# EAGLE board jimduino (EAGLE 7.4.0)
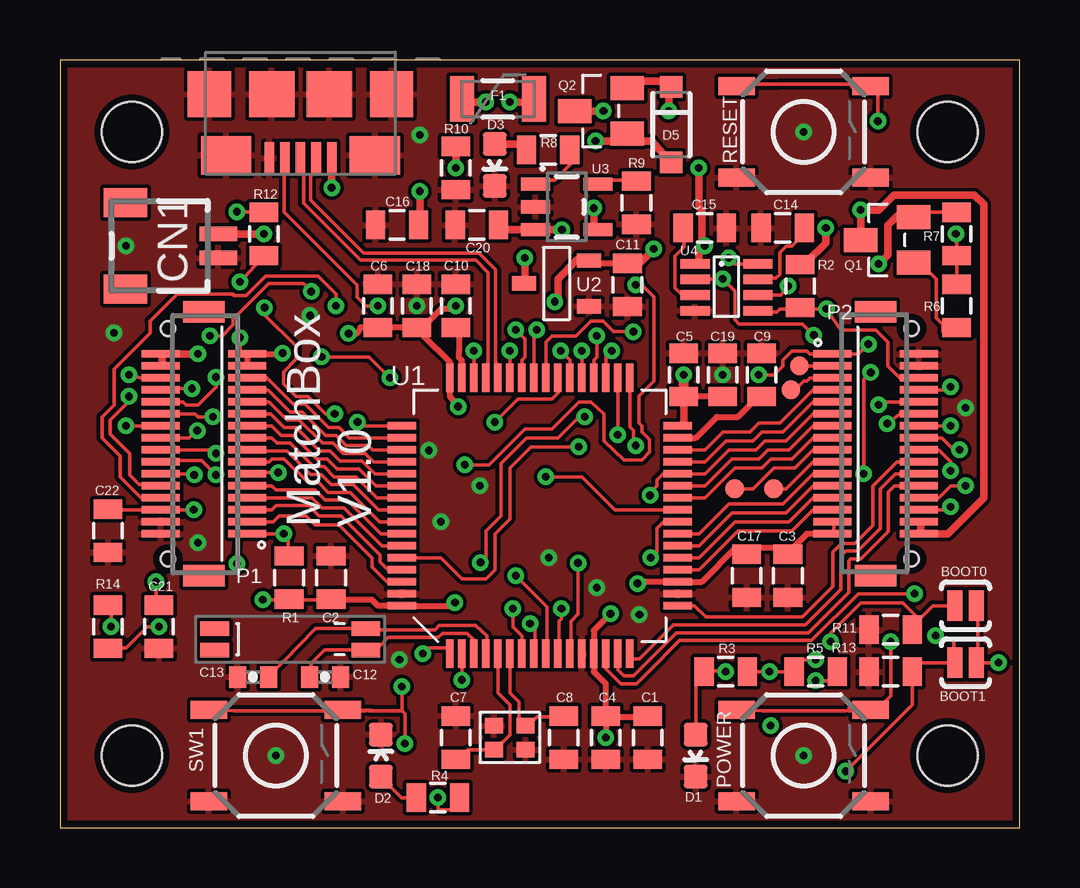
[diagram p0: board, top side]
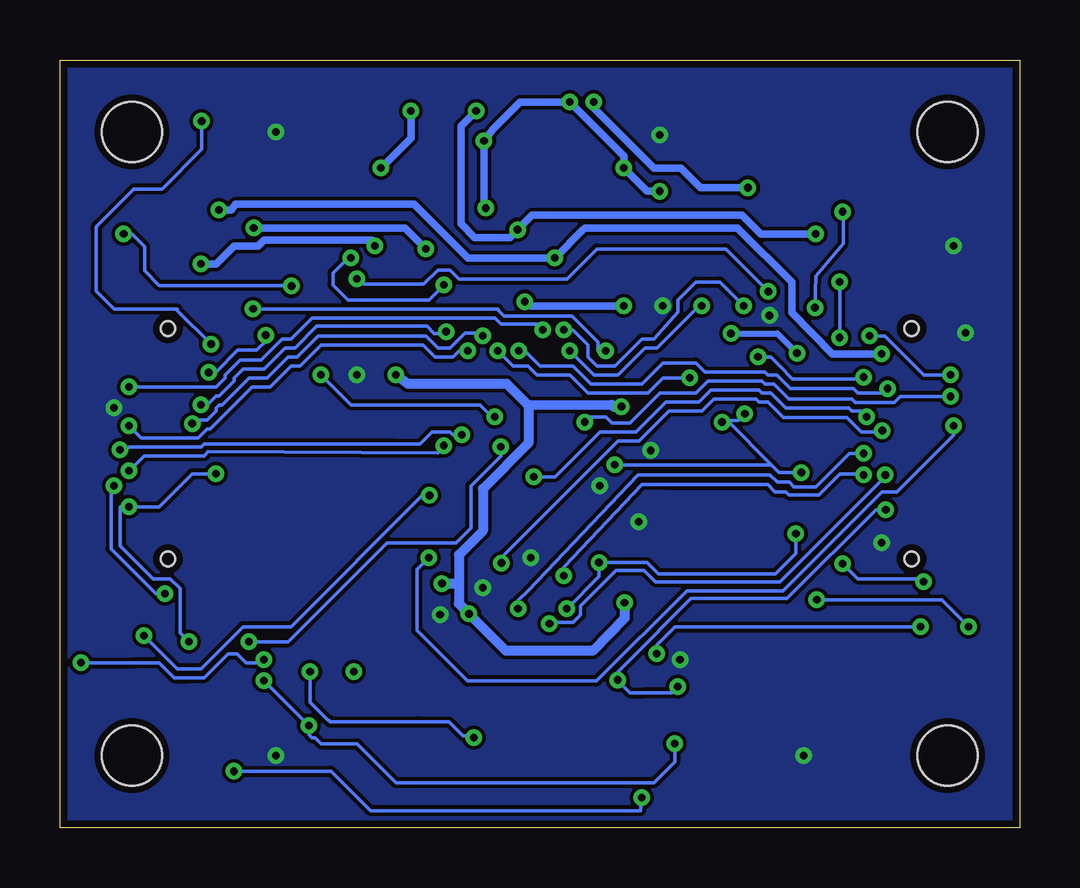
[diagram p1: board, bottom side, seen from below]

Size 40 x 32 mm. Coordinates in mm from the lower left corner, seen from the top.
Outline: 0,0 40,0 40,32 0,32 0,0
Copper layers (1*16): Top 0.0356mm / dielectric 1.5011mm / Bottom 0.0356mm
Design rules "LaenPCBOrder (2) *": minimum track width 6mil, minimum drill 13mil, track to track 6mil, track to pad 6mil, pad to pad 6mil, via to via 6mil, smd to smd 6mil, copper to edge 12mil, drill to drill 6mil, minimum pad ring 7mil, minimum via ring 7mil, stop-mask expansion 14mil, vias tented up to drill 14mil, thermal gap 6mil
Holes 2.5 mm at 3,29 37,29 37,3 3,3

## Footprints (pad centres in the part's own frame; a part is rotated, then mirrored left to right if it is on the bottom)
PAD-JUMPER-2-NO_YES_SILK = smd 0.635 x 1.27: 1 -0.45,0; 2 0.45,0
0805 = smd 0.8 x 1.2: 1 -0.9,0; 2 0.9,0
0402-CAP = smd 0.7 x 0.9: 1 -0.65,0; 2 0.65,0
SM02B-SRSS-TB = smd 0.6 x 1.55: 1 -0.5,2.975; 2 0.5,2.975 | smd 1.2 x 1.8: FIT@1 -1.8,-0.9; FIT@2 1.8,-0.9
LED-0603 = smd 1 x 1: A 0,-0.877; C 0,0.877
SOD-123 = smd 0.9 x 0.95: A 1.575,0; C -1.575,0
PTC-1206 = smd 1 x 1.9: 1 -1.5,0; 2 1.5,0
DF12-32-DP = smd 0.3 x 1.6: 1 -3.75,-1.8; 2 -3.75,1.8; 3 -3.25,-1.8; 4 -3.25,1.8; 5 -2.75,-1.8; 6 -2.75,1.8; 7 -2.25,-1.8; 8 -2.25,1.8; 9 -1.75,-1.8; 10 -1.75,1.8; 11 -1.25,-1.8; 12 -1.25,1.8; 13 -0.75,-1.8; 14 -0.75,1.8; 15 -0.25,-1.8; 16 -0.25,1.8; 17 0.25,-1.8; 18 0.25,1.8; 19 0.75,-1.8; 20 0.75,1.8; 21 1.25,-1.8; 22 1.25,1.8; 23 1.75,-1.8; 24 1.75,1.8; 25 2.25,-1.8; 26 2.25,1.8; 27 2.75,-1.8; 28 2.75,1.8; 29 3.25,-1.8; 30 3.25,1.8; 31 3.75,-1.8; 32 3.75,1.8 | smd 0.889 x 1.727: F1 -5.5,0; F2 5.5,0 | hole 0.6: -4.8,1.5; 4.8,1.5
TACTILE-SWITCH-SMD = smd 1.524 x 0.762: 1 -2.794,1.905; 2 2.794,1.905; 3 -2.794,-1.905; 4 2.794,-1.905
SUPER-SOT3 = smd 1 x 1.4: 1 -0.95,-1.1; 2 0.95,-1.1; 3 0,1.1
PAD.03X.03 = smd 0.762 x 0.762: P$1 0,0
LQFP64 = smd 0.3 x 1.2: 1 -3.75,-5.75; 2 -3.25,-5.75; 3 -2.75,-5.75; 4 -2.25,-5.75; 5 -1.75,-5.75; 6 -1.25,-5.75; 7 -0.75,-5.75; 8 -0.25,-5.75; 9 0.25,-5.75; 10 0.75,-5.75; 11 1.25,-5.75; 12 1.75,-5.75; 13 2.25,-5.75; 14 2.75,-5.75; 15 3.25,-5.75; 16 3.75,-5.75; 33 3.75,5.75; 34 3.25,5.75; 35 2.75,5.75; 36 2.25,5.75; 37 1.75,5.75; 38 1.25,5.75; 39 0.75,5.75; 40 0.25,5.75; 41 -0.25,5.75; 42 -0.75,5.75; 43 -1.25,5.75; 44 -1.75,5.75; 45 -2.25,5.75; 46 -2.75,5.75; 47 -3.25,5.75; 48 -3.75,5.75 | smd 1.2 x 0.3: 17 5.75,-3.75; 18 5.75,-3.25; 19 5.75,-2.75; 20 5.75,-2.25; 21 5.75,-1.75; 22 5.75,-1.25; 23 5.75,-0.75; 24 5.75,-0.25; 25 5.75,0.25; 26 5.75,0.75; 27 5.75,1.25; 28 5.75,1.75; 29 5.75,2.25; 30 5.75,2.75; 31 5.75,3.25; 32 5.75,3.75; 49 -5.75,3.75; 50 -5.75,3.25; 51 -5.75,2.75; 52 -5.75,2.25; 53 -5.75,1.75; 54 -5.75,1.25; 55 -5.75,0.75; 56 -5.75,0.25; 57 -5.75,-0.25; 58 -5.75,-0.75; 59 -5.75,-1.25; 60 -5.75,-1.75; 61 -5.75,-2.25; 62 -5.75,-2.75; 63 -5.75,-3.25; 64 -5.75,-3.75
SOT23A = smd 0.6 x 1: 1 -0.95,-1.3; 2 0.95,-1.3; 3 0,1.4
SOT23-5 = smd 0.55 x 1.2: 1 -0.95,-1.3; 2 0,-1.3; 3 0.95,-1.3; 4 0.95,1.3; 5 -0.95,1.3
SOT23-8 = smd 0.4 x 1.22: 1 0,0; 2 0.65,0; 3 1.3,0; 4 1.95,0; 5 1.95,2.62; 6 1.3,2.62; 7 0.65,2.62; 8 0,2.62
MICROUSB = smd 0.4 x 1.35: 1 -1.3,2.675; 2 -0.65,2.675; 3 0,2.675; 4 0.65,2.675; 5 1.3,2.675 | smd 2.1 x 1.6: 6 -3.1,2.55; 7 3.1,2.55 | smd 1.8 x 1.9: 8 -3.8,0; 11 3.8,0 | smd 1.9 x 1.9: 9 -1.2,0; 10 1.2,0
ABM11 = smd 0.75 x 0.65: 1 -0.65,-0.5; 2 0.65,-0.5; 3 0.65,0.5; 4 -0.65,0.5
CRYSTAL-32KHZ-SMD_EPSON_MC146 = smd 1.2 x 0.6: NC1 6.9,1.2; NC2 6.9,0.3; P$1 0.6,0.3; P$2 0.6,1.2

## Placement (x,y rotation side)
BOOT0  JUMPER-PAD-2-NOYES_SILK  [PAD-JUMPER-2-NO_YES_SILK]  37.75,9.25 0 top
BOOT1  JUMPER-PAD-2-NOYES_SILK  [PAD-JUMPER-2-NO_YES_SILK]  37.75,6.88 0 top
C1  1uF  [0805]  24.5,3.75 270 top
C2  1uF  [0805]  11.3,10.43 90 top
C3  1uF  [0805]  30.34,10.5 270 top
C4  0.1uF  [0805]  22.75,3.75 270 top
C5  0.1uF  [0805]  26,18.88 90 top
C6  1uF  [0805]  13.25,21.75 90 top
C7  4pF  [0805]  16.5,3.75 90 top
C8  4pF  [0805]  21,3.75 270 top
C9  2.2uF  [0805]  29.25,18.88 270 top
C10  2.2uF  [0805]  16.5,21.75 270 top
C11  1uF  [0805]  23.65,22.62 270 top
C12  8pF  [0402-CAP]  11.05,6.28 0 top
C13  8pF  [0402-CAP]  8.05,6.28 180 top
C14  1uF  [0805]  30.12,25 180 top
C15  .033uF  [0805]  26.88,25 0 top
C16  10uF  [0805]  14.05,25.12 180 top
C17  0.1uF  [0805]  28.62,10.5 270 top
C18  0.1uF  [0805]  14.88,21.75 90 top
C19  1uF  [0805]  27.62,18.88 90 top
C20  10uF  [0805]  17.38,25.12 180 top
C21  0.1uF  [0805]  4.12,8.38 270 top
C22  0.1uF  [0805]  2,12.38 270 top
CN1  SM02B-SRSS-TB  [SM02B-SRSS-TB]  3.62,24.25 270 top
D1  PWR  [LED-0603]  26.5,3 180 top
D2  PB2  [LED-0603]  13.38,3 0 top
D3  CHG  [LED-0603]  18.12,27.62 180 top
D5  MBR120  [SOD-123]  25.48,29.3 270 top
F1  PTCSMD  [PTC-1206]  18.25,30.38 0 top
P1  DF12-32-DP  [DF12-32-DP]  6,16 90 top
P2  DF12-32-DP  [DF12-32-DP]  34,16 270 top
POWER  SWITCH-MOMENTARY-2SMD-REDUNDANT  [TACTILE-SWITCH-SMD]  31,3 0 top
Q1  FDN360P  [SUPER-SOT3]  34.48,24.5 90 top
Q2  FDN360P  [SUPER-SOT3]  22.55,29.88 90 top
R1  10k  [0805]  9.55,10.43 270 top
R2  10k  [0805]  30.85,22.57 270 top
R3  1k  [0805]  27.75,6.5 0 top
R4  1k  [0805]  15.75,1.25 0 top
R5  10k  [0805]  31.5,6.5 180 top
R6  100k  [0805]  37.38,21.75 90 top
R7  100k  [0805]  37.38,24.75 270 top
R8  1k  [0805]  20.35,28.25 0 top
R9  4.7k  [0805]  24.02,26.05 270 top
R10  100k  [0805]  16.5,27.5 270 top
R11  10k  [0805]  34.62,8.25 180 top
R12  10k  [0805]  8.5,24.75 90 top
R13  10k  [0805]  34.62,6.5 180 top
R14  0k  [0805]  2,8.38 270 top
RESET  SWITCH-MOMENTARY-2SMD-REDUNDANT  [TACTILE-SWITCH-SMD]  31,29 0 top
RSV0  TEST-POINT3  [PAD.03X.03]  30.82,19.25 0 top
RSV1  TEST-POINT3  [PAD.03X.03]  30.48,18.25 0 top
RSV2  TEST-POINT3  [PAD.03X.03]  28.12,14.12 0 top
RSV3  TEST-POINT3  [PAD.03X.03]  29.75,14.12 0 top
SW1  SWITCH-MOMENTARY-2SMD-REDUNDANT  [TACTILE-SWITCH-SMD]  9,3 0 top
U1  STM32F415R  [LQFP64]  20,13 0 top
U2  MCP1703  [SOT23A]  20.75,22.69 90 top
U3  MCP73831  [SOT23-5]  21.12,25.88 270 top
U4  LTC2954-2  [SOT23-8]  26.48,23.5 270 top
U$1  MICROUSB  [MICROUSB]  10.03,30.57 180 top
Y1  16MHz(9pF)  [ABM11]  18.75,3.75 180 top
Y2  32.768kHz (9pF)  [CRYSTAL-32KHZ-SMD_EPSON_MC146]  13.35,8.6 180 top

## Library data of the parts
BOOT0 BOOT1 R1-R14 RSV0 RSV1-RSV3 = SparkFun-Passives
C1-C22 = SparkFun-Capacitors
CN1 = con-jst2
D1-D3 = SparkFun-LED
D5 = SparkFun-DiscreteSemi
F1 = SparkFun-PowerIC; PROD_ID: RES-11150
P1 P2 = micro1292; PARTNO: AS-ITM-00015
POWER RESET SW1 = SparkFun-Electromechanical; PROD_ID: SWCH-08247
Q1 Q2 = transistor-power
U1 = stm32f4
U2 = linear
U3 = SparkFun-PowerIC; PROD_ID: IC-09995
U4 = GeekAmmo
U$1 = jimduino
Y1 = micro1292; PARTNO: AS-ITM-00228
Y2 = SparkFun-FreqCtrl

## Nets
BOOT0: BOOT0.1 R11.1 U1.60
GND: C1.2 C2.2 C3.2 C4.2 C5.2 C6.2 C7.2 C8.2 C9.1 C10.1 C11.2 C12.2 C13.2 C14.2 C15.2 C16.2 C17.2 C18.2 C19.2 C20.2 C21.2 C22.2 CN1.2 D1.C D2.C D3.C P1.2 P1.4 P2.2 P2.4 POWER.3 POWER.4 R9.2 R10.2 R11.2 R13.2 RESET.3 RESET.4 SW1.3 SW1.4 U1.12 U1.18 U1.63 U2.1 U3.2 U4.4 U$1.5 U$1.6 U$1.7 U$1.8 U$1.9 U$1.10 U$1.11 Y1.2 Y1.4
N$1: C9.2 U1.31
N$2: C10.2 U1.47
N$3: C15.1 U4.3
N$4: C14.1 U4.7
N$5: D1.A R3.1
N$6: D2.A R4.1
N$8: R6.2 R7.2 U4.6
N$9: Q1.1 R6.1
N$10: D3.A R8.1
N$11: R9.1 U3.5
OSC32K_IN: C12.1 U1.3 Y2.P$2
OSC32K_OUT: C13.1 U1.4 Y2.P$1
OSC_IN: C7.1 U1.5 Y1.3
OSC_OUT: C8.1 U1.6 Y1.1
PA0: P2.26 U1.14
PA1: P2.24 U1.15
PA2: P2.22 U1.16
PA3: P2.20 U1.17
PA4: P2.27 U1.20
PA5: P2.25 U1.21
PA6: P2.23 U1.22
PA7: P2.21 U1.23
PA8: P2.8 U1.41
PA9: P1.8 U1.42
PA10: U1.43 U$1.4
PA11: U1.44 U$1.2
PA12: U1.45 U$1.3
PA13: P2.6 R2.2 U1.46 U4.5
PA14: P1.11 R12.2 U1.49 U4.8
PA15: P1.27 U1.50
PB0: P2.15 U1.26
PB1: P2.13 U1.27
PB2: BOOT1.1 P2.11 R4.2 R13.1 U1.28
PB3: P1.17 U1.55
PB4: P1.15 U1.56
PB5: P1.13 U1.57
PB6: P1.9 U1.58
PB7: P1.7 U1.59
PB8: P1.5 U1.61
PB9: P1.3 U1.62
PB10: P2.9 U1.29
PB11: P2.7 U1.30
PB12: P2.18 U1.33
PB13: P2.16 U1.34
PB14: P2.14 U1.35
PB15: P2.12 U1.36
PC0: P1.12 U1.8
PC1: P1.14 U1.9
PC2: P1.16 U1.10
PC3: P1.18 U1.11
PC4: P1.20 U1.24
PC5: P1.22 U1.25
PC6: P1.24 U1.37
PC7: P1.26 U1.38
PC8: P1.10 U1.39
PC9: P2.10 U1.40
PC10: P1.25 U1.51
PC11: P1.23 U1.52
PC12: P1.21 U1.53
PC13: C22.1 P1.6 R5.1 SW1.1 SW1.2 U1.2
PD2: P1.19 U1.54
PWR_ON: P1.28 P2.28 POWER.1 POWER.2 U4.2
RESET#: C21.1 P1.1 P2.1 R1.1 RESET.1 RESET.2 U1.7
RSV0: P2.3 RSV0.P$1
RSV1: P2.5 RSV1.P$1
RSV2: P2.17 RSV2.P$1
RSV3: P2.19 RSV3.P$1
STAT: R8.2 U3.1
VBAT: C20.1 CN1.1 Q2.3 U3.3
VCC: P1.30 P1.32 P2.30 P2.32 Q1.3 U2.3
VCC_3V3: BOOT0.2 BOOT1.2 C1.1 C2.1 C3.1 C4.1 C5.1 C6.1 C11.1 C17.1 C18.1 C19.1 P1.29 P1.31 P2.29 P2.31 R1.2 R2.1 R3.2 R5.2 R12.1 R14.1 U1.13 U1.19 U1.32 U1.48 U1.64 U2.2
VCC_BKUP: R14.2 U1.1
VCC_SEL: D5.C Q1.2 Q2.2 R7.1 U4.1
VCC_USB: F1.1 U$1.1
VCC_USBF: C16.1 D5.A F1.2 Q2.1 R10.1 U3.4

## Tracks (layer width: path | path; a pad name or v marks a point on that pad's centre or on a via)
BOOT0  (via drill 0.33)
  Top 0.152: 14.2,11.3 U1.60 15.88,11.25 16.75,10.38 17.75,10.38 18.12,10.75 18.12,11.38 18.12,12.25 18.75,12.88 18.75,15 19.62,15.88 20.88,15.88 v21.62,15.88 | 35.62,8.5 35.75,8.62 | 35.62,8.5 35.62,8.38 R11.1 | v32.12,7.75 32.12,8.12 33.38,9.38 35.12,9.38 35.62,8.88 35.62,8.5 | 35.62,8.5 R11.1 | 35.75,8.62 36.38,9.25 37,9.25 BOOT0.1 | 35.75,8.62 R11.1
  Bottom 0.152: v21.62,15.88 21.62,15.5 22.88,14.25 22.88,12.5 23.5,11.88 26.38,11.88 30.5,7.75 v32.12,7.75
GND  (via drill 0.33)
  Top 0.254: 35.88,19.75 P2.2 35.88,19.75
  other vias: 14.15,7 22.38,10 9,3 2.75,24.25 37.75,17.5 24.15,8.88 14.88,21.75 31,3 31,29 27.62,18.88 20.38,11.25 15.38,15.72 15.88,12.75 2.25,20.62 5.75,11.88 17.5,14.25 15,28.88 10.43,21.35
  pour Top: 0,0 40,0 40,32 0,32
  pour Bottom: 0,0 40,0 40,32 0,32
N$1
  Top 0.254: U1.31 26.5,16.25 27.38,17.12 28.25,17.12 29,17.88 C9.2
N$2
  Top 0.254: C10.2 16.6,20.85 16.62,20.82 16.62,19.85 16.62,19.6 16.75,19.48 U1.47
N$3
  Top 0.152: 25.95,24.6 26.15,24.8 26.15,25.5 C15.1 26.12,24.88 26,24.88 26,24.2 25.62,23.82 25.62,22.5 25.95,22.2 U4.3
N$4
  Top 0.152: U4.7 29.15,22.9 29.85,22.9 30,23.05 30,23.75 30,23.98 30.27,24.25 30.5,24.25 31.05,24.8 31.05,25.5 C14.1
N$5  (via drill 0.33)
  Top 0.152: v27.75,6.5 27.48,6.53 27,6.53 R3.1 26.5,6.2 26.5,4.75 D1.A
N$6
  Top 0.152: D2.A 14.25,1.25 R4.1
N$8  (via drill 0.33)
  Top 0.152: v30.35,22.57 30.05,22.2 29.15,22.2 U4.6 | 37.15,23.68 37.35,23.88 arc-90 R7.2 | R7.2 37.38,23.75 | 37.38,23.75 R6.2 | 37.25,23.88 R7.2 | 37.38,23.75 37.5,23.88 37.38,24 37.38,24.75 v37.35,24.75 | 37.38,23.75 R7.2
  Bottom 0.152: v30.35,22.57 30.38,22.6 30.43,22.6 31.98,22.6 32,22.6 34.25,22.6 35.85,22.6 36.48,23.22 36.48,24.23 37,24.75 v37.35,24.75
N$9
  Top 0.152: R6.1 36.8,20.68 36.8,20.98 36.52,21.25 36.52,22.88 35.8,23.6 35.1,23.6 Q1.1
N$10
  Top 0.305: R8.1 19.25,28.38 19.12,28.5 18,28.5 D3.A
N$11
  Top 0.152: R9.1 24,27 22.38,27 U3.5
OSC32K_IN
  Top 0.152: U1.3 17.25,7.83 16.98,8.1 15.95,8.1 15.75,7.92 13.68,7.92 13.35,7.58 12.8,7.58 Y2.P$2 12.68,7.4 11.22,7.4 11.03,7.4 10.47,6.85 10.47,6.28 C12.1
OSC32K_OUT
  Top 0.152: U1.4 17.8,7.3 17.8,8 17.32,8.43 15.8,8.43 15.62,8.25 13.25,8.25 | Y2.P$1 12.75,8.43 | 12.88,8.12 12.88,8.25 | 12.88,8.25 12.75,8.38 Y2.P$1 | 13.12,8.25 13.25,8.25 | 12.88,8.25 13.25,8.25 | C13.1 10.65,8.3 Y2.P$1
OSC_IN
  Top 0.152: U1.5 18.25,5.62 18.75,5.12 18.75,4 18.75,3.88 18.25,3.38 18.25,3.25 18.12,3.25 Y1.3 18,3.25 17,3.25 16.62,2.88 C7.1
OSC_OUT
  Top 0.152: U1.6 18.75,5.62 19.12,5.25 19.12,4.5 19.38,4.25 Y1.1 19.5,4.25 19.88,4.62 21,4.62 C8.1
PA0  (via drill 0.33)
  Top 0.152: P2.26 36.62,13.75 37.12,14.25 v37.75,14.25 | v35.62,9.75 33.27,9.75 31.32,7.8 25.82,7.8 24.52,6.5 24.02,6 23.38,6 22.75,6.62 U1.14
  Bottom 0.152: v37.75,14.25 37.88,14.25 37.88,11.62 36,9.75 v35.62,9.75
PA1
  Top 0.152: P2.24 34.77,14.25 34.52,14 34.52,12.35 33.38,11.2 32.95,11.2 32.88,11.12 32.88,9.8 31.2,8.12 25.7,8.12 24.2,6.62 23.9,6.33 23.5,6.33 23.25,6.58 U1.15
PA2
  Top 0.152: 35.75,14.75 P2.22 34.83,14.75 34.2,14.12 34.2,12.47 33.25,11.53 32.75,11.53 32.55,11.32 32.55,9.93 31.07,8.45 31,8.45 25.57,8.45 24.15,7.03 24.02,7.03 23.77,7.03 23.75,7.05 U1.16
PA3
  Top 0.152: P2.20 34.88,15.25 33.88,14.25 33.88,12.6 33.12,11.85 32.58,11.85 32.23,11.49 32.23,10.05 30.95,8.78 26.93,8.78 26.45,9.25 U1.17
PA4
  Top 0.152: U1.20 26.62,10.75 28.25,12.38 30.5,12.38 31.38,13.25 32.12,13.25 P2.27
PA5
  Top 0.152: U1.21 26.62,11.25 28.12,12.75 30.38,12.75 31.38,13.75 32.12,13.75 P2.25
PA6
  Top 0.152: U1.22 26.62,11.75 28,13.12 30.25,13.12 31.38,14.25 32.12,14.25 P2.23
PA7
  Top 0.152: U1.23 26.62,12.25 27.88,13.5 30.12,13.5 31.38,14.75 32.12,14.75 P2.21
PA8  (via drill 0.33)
  Top 0.152: v37.12,18.38 37,18.25 P2.8 | U1.41 19.75,20.38 19.75,20.62 v19.88,20.75
  Bottom 0.152: v37.12,18.38 33.5,18.38 33.12,18.75 33.12,18.88 32.5,19.5 31.62,19.5 30.75,20.38 30.38,20.38 29.5,21.25 21.88,21.25 21.62,21 20.12,21 v19.88,20.75
PA9  (via drill 0.33)
  Top 0.152: 4.17,13.75 P1.8 4.12,13.75 3.38,13.75 2.5,14.62 2.5,15.5 1.75,16.25 1.75,17.12 2.25,17.62 2.25,19.12 3.75,20.62 3.75,21.12 4.88,22.25 7.17,22.25 7.28,22.18 7.75,22.18 8.15,22.57 8.57,23 10.18,23 10.25,23 10.75,23 11.5,22.25 v11.5,21.75 | U1.42 19.25,19.5 19.38,19.62 19.38,19.75 19.38,20 19.38,20.38 v19,20.75
  Bottom 0.152: v11.5,21.75 12.5,22.75 13.5,22.75 14.25,22 14.25,21.5 15.25,20.38 15.75,20.38 16.88,19.25 17.62,19.25 18,19.62 18,20.12 18.62,20.75 v19,20.75
PA10  (via drill 0.33)
  Top 0.152: U1.43 v18.75,19.88 18.75,20 | v13.25,21.75 12.75,21.75 12.38,22.12 12.38,22.62 9.35,25.65 9.35,27.82 U$1.4
  Bottom 0.152: v13.25,21.75 13.38,21.75 15,20.12 15.12,20 15.62,20 16.75,18.88 17.75,18.88 v18.75,19.88
PA11
  Top 0.152: U1.44 18.25,19.3 18.15,19.4 18.15,23.26 17.46,23.95 12.66,23.95 10.45,26.16 10.45,27.15 10.62,27.35 10.62,27.68 10.62,27.8 U$1.2
PA12
  Top 0.152: U1.45 17.75,19.3 17.85,19.4 17.85,23.14 17.34,23.65 12.54,23.65 10.15,26.04 10.15,28.1 10.03,27.98 U$1.3
PA13  (via drill 0.33)
  Top 0.152: 17.3,18.8 U1.46 v17.25,19.88 | P2.6 35,18.75 34.5,19.25 34.5,20.25 34,20.75 32.8,20.75 32.55,20.75 v31.95,21.62 31.65,21.62 31.25,21.62 R2.2 30.75,21.62 30,21.62 29.88,21.5 29.12,21.5 | 29.12,21.5 U4.5 29.12,21.5
  Bottom 0.152: v17.25,19.88 17.57,19.88 17.57,20.25 18.65,21.32 21.5,21.32 21.73,21.55 21.75,21.62 31.85,21.62 v31.95,21.62
PA14  (via drill 0.33)
  Top 0.152: 7.81,14.75 P1.11 7.9,14.8 v9.1,14.8 | 14.2,16.8 U1.49 | 14.06,16.75 14.12,16.81 U1.49 | v12.4,16.9 12.53,16.75 U1.49 | v16.88,15.12 17.88,15.12 19.38,16.62 20.5,16.62 21.62,17.75 22.12,17.75 22.68,17.25 22.68,16.12 23.5,15.32 24.25,15.32 24.57,15.65 24.57,16.18 24.25,16.5 24.25,16.75 24.12,16.88 24.12,18 24.75,18.62 24.75,22.12 24.25,22.62 v24,22.62 | v27.88,23.75 28.12,23.5 U4.8 | 12.38,16.98 v12.4,16.9 | v8.53,21.68 8.53,21.38 9.85,20.07 9.85,19.52 9.32,19 9.32,18.5 9.85,17.98 10.35,17.98 11.07,17.25 v11.45,17.25 | 12.38,17.05 v12.4,16.9 | v7.38,25.68 7.75,25.68 7.78,25.65 R12.2
  Bottom 0.152: 10.36,15.14 12.12,16.9 v12.4,16.9 12.1,16.98 11.72,16.98 v11.45,17.25 | 10.36,15.14 10.03,14.8 v9.1,14.8 | v16.88,15.12 10.38,15.12 10.36,15.14 | v24,22.62 24.62,22 28,22 28.62,22.62 28.62,23.12 28,23.75 v27.88,23.75 | v7.38,25.68 7.35,25.68 7.35,24.35 8.5,23 v8.53,21.68
PA15
  Top 0.152: U1.50 12.05,16.25 11.62,16.68 11.2,16.68 10.22,17.65 9.72,17.65 8.62,18.75 7.83,18.75 P1.27
PB0
  Top 0.152: U1.26 26.88,13.75 28.12,15 29.25,15 29.62,15.38 30.5,15.38 31.38,16.25 32.12,16.25 P2.15
PB1
  Top 0.152: P2.13 32.12,16.75 31.38,16.75 30.5,15.88 30.38,15.75 29.5,15.75 29.12,15.38 28,15.38 26.88,14.25 U1.27
PB2  (via drill 0.33)
  Top 0.152: P2.11 32.12,17.25 31.38,17.25 30.25,16.12 29.38,16.12 29,15.75 27.88,15.75 26.88,14.75 U1.28 25.12,14.75 24.88,14.5 24.88,14.25 24.5,13.88 v24.6,13.85 | 37.25,6.88 37,6.88 35.62,6.88 35.5,6.75 35.5,6.5 R13.1 35.52,6.42 35.52,5.12 v32.75,2.35 | 37.25,6.88 BOOT1.1 37.25,6.88 | 37.25,6.88 37.25,7.75 37.12,7.88 36.62,7.88 v36.5,8 | R4.2 16.62,1.12 16.62,0.88 16.5,0.75 16.25,0.75 15.75,0.75 v15.75,1.25
  Bottom 0.152: v36.5,8 35.12,6.62 34.12,6.62 33.62,7.12 32.38,8.38 30.38,8.38 24.9,13.85 v24.6,13.85 | v15.75,1.25 15.8,0.7 27.05,0.7 28.7,2.35 v32.75,2.35
PB3
  Top 0.152: U1.55 13.22,13.75 12.35,14.62 11.43,14.62 11,15.05 10.57,15.05 9.6,16.02 9.05,16.02 8.82,16.25 7.83,16.25 P1.17
PB4
  Top 0.152: U1.56 13.28,13.25 12.22,14.3 11.3,14.3 10.88,14.72 10.45,14.72 9.47,15.7 8.57,15.7 8.53,15.75 7.83,15.75 P1.15
PB5
  Top 0.152: P1.13 7.83,15.25 8.72,15.25 8.85,15.38 9.35,15.38 10.32,14.4 10.75,14.4 11.18,13.97 11.43,13.97 12.1,13.97 13.32,12.75 U1.57
PB6
  Top 0.152: P1.9 7.83,14.25 8.82,14.25 9,14.07 10.62,14.07 11.05,13.65 11.97,13.65 12.82,12.8 13.38,12.25 U1.58
PB7
  Top 0.152: 7.81,13.75 P1.7 7.88,13.75 10.5,13.75 10.93,13.32 11.85,13.32 13.43,11.75 U1.59
PB8
  Top 0.152: P1.5 7.83,13.25 8.82,13.25 9,13.43 10.38,13.43 10.8,13 11.72,13 13.35,11.38 13.35,11.32 13.35,11.07 13.68,10.75 U1.61
PB9
  Top 0.152: P1.3 7.88,12.75 8.88,12.75 9.12,13 10.25,13 10.62,12.62 11.62,12.62 13,11.25 13,10.88 13.62,10.25 U1.62
PB10
  Top 0.152: U1.29 26.88,15.25 27.75,16.12 28.88,16.12 29.25,16.5 30.12,16.5 31.38,17.75 32.12,17.75 P2.9
PB11
  Top 0.152: U1.30 26.88,15.75 27.62,16.5 28.75,16.5 29.12,16.88 30,16.88 31.38,18.25 32.12,18.25 P2.7
PB12  (via drill 0.33)
  Top 0.152: U1.33 23.75,16.7 23.9,16.55 23.9,16.02 v24,15.93 | v37.12,14.88 37.12,15.25 36.62,15.75 P2.18
  Bottom 0.152: v24,15.93 24.07,15.93 24.07,15.8 24.25,15.62 33.83,15.68 34,15.5 36.5,15.5 v37.12,14.88
PB13  (via drill 0.33)
  Top 0.152: U1.34 23.25,16.43 v23.25,16.38 | 35.75,16.25 P2.16 36.75,16.25 37.25,15.75 v37.5,15.75
  Bottom 0.152: 32.8,16 26.12,16 26.1,16 25,16 24.5,16.5 23.75,16.5 23.62,16.38 23.38,16.38 v23.25,16.38 | v37.5,15.75 37.25,15.75 37.12,15.88 34.38,15.88 34.12,15.88 34,16 32.88,16 | 32.88,16 32.8,16 | 32.88,16 32.8,16
PB14  (via drill 0.33)
  Top 0.152: v23,19.88 22.75,19.62 U1.35 | P2.14 v37.12,16.75
  Bottom 0.152: v37.12,16.75 36.62,16.25 34.25,16.25 33.88,16.62 33.75,16.62 32,18.38 31.25,18.38 30.38,19.25 30,19.25 29.12,20.12 24.88,20.12 24.38,19.62 23.62,19.62 23.38,19.88 v23,19.88
PB15  (via drill 0.33)
  Top 0.152: v34.49,16.84 35,17.25 P2.12 | v22.38,20.5 22.38,19.62 22.25,19.5 U1.36
  Bottom 0.152: v22.38,20.5 22.5,20.62 23.12,20.62 23.75,20 24.25,20 24.75,20.5 29.25,20.5 30.12,19.62 30.5,19.62 31.38,18.75 31.75,18.75 32.12,18.75 33.25,17.62 33.38,17.62 33.5,17.5 33.5,17.38 33.88,17 34.25,17 34.38,16.88 v34.49,16.84
PC0  (via drill 0.33)
  Top 0.152: v19.6,8.5 19.8,8.3 19.8,7.3 U1.8 | P1.12 5.5,14.75 v5.6,14.7
  Bottom 0.152: v5.6,14.7 5.62,14.62 10,10.25 15.18,10.25 15.28,10.35 15.65,10.72 16.82,10.72 18.3,9.25 18.3,8.88 18.62,8.55 19.55,8.55 v19.6,8.5
PC1  (via drill 0.33)
  Top 0.152: U1.9 20.3,7.3 20.3,9.2 20.2,9.3 v19,10.5 | v6.5,14.7 5.9,15.3 4.2,15.3 P1.14
  Bottom 0.152: v19,10.5 19,10.88 15.75,14.3 14.7,14.3 14.6,14.3 10.5,14.3 10.2,14 10.12,14 9.75,14 9.62,13.88 8.38,13.88 7.5,14.75 6.5,14.75 v6.5,14.7
PC2  (via drill 0.33)
  Top 0.152: U1.10 20.8,7.3 20.8,8.6 20.9,8.7 v20.9,9.12 20.9,9.3 | P1.16 6.35,15.75 v6.5,15.6
  Bottom 0.152: v20.9,9.12 20.9,9.47 20.5,9.88 15.9,14.7 14.9,14.7 14.7,14.7 10.4,14.7 10.1,14.4 9.6,14.4 9.4,14.2 8.5,14.2 7.1,15.6 7.04,15.59 7,15.6 v6.5,15.6
PC3  (via drill 0.33)
  Top 0.152: U1.11 21.3,7.3 21.3,8.6 21.6,8.9 v21.6,11.03 | P1.18 5.38,16.25 v5.72,16.55
  Bottom 0.152: v5.72,16.55 5.8,16.5 6.6,16.5 7.2,17.1 9.85,17.1 10.5,17.75 10.88,17.75 11,17.88 12.75,17.88 13.25,17.38 14.62,17.38 15.88,16.12 16.75,16.12 21.62,11.25 21.62,11 v21.6,11.03
PC4  (via drill 0.33)
  Top 0.152: U1.24 25.16,12.75 24.88,12.47 24.88,11.5 v24.62,11.25 | P1.20 v2.75,16.75
  Bottom 0.152: v24.62,11.25 25.12,10.75 25.12,8.22 23.01,6.11 17.64,6.11 13.88,9.88 9.88,9.88 5.75,14 5.12,14 2.75,16.38 v2.75,16.75
PC5  (via drill 0.33)
  Top 0.152: U1.25 23.12,13.25 21.75,14.62 v20.25,14.62 | P1.22 5.62,17.25 5.75,17.12 v6.38,17.12
  Bottom 0.152: v6.38,17.12 6.62,17.38 7,17.38 7.12,17.5 9.75,17.5 10.38,18.12 10.75,18.12 10.88,18.25 12.88,18.25 13.38,17.75 14.75,17.75 16,16.5 17.12,16.5 17.5,16.5 18.25,15.75 19.38,14.62 v20.25,14.62
PC6  (via drill 0.33)
  Top 0.152: 21.8,18.8 U1.37 v21.75,19.88 | P1.24 5.12,17.75 5.25,17.62 5.75,17.62 6.5,18.38 v6.5,18.77 | v13.75,18.75 12.88,19.62 v10.9,19.62
  Bottom 0.152: v6.5,18.77 6.58,18.7 9.47,18.7 10,19.25 10.38,19.62 v10.9,19.62 | v13.75,18.75 14.88,18.75 15.25,18.38 15.5,18.12 18,18.12 18.25,18.38 18.75,18.88 19,18.88 20.12,18.88 20.5,19.25 21.12,19.25 v21.75,19.88
PC7  (via drill 0.33)
  Top 0.152: v5.5,18.3 4.2,18.3 P1.26 | 21.3,18.8 U1.38 21.25,19.5 v20.88,19.88
  Bottom 0.152: v5.5,18.3 5.67,18.12 6.75,18.12 6.89,18.26 | 6.89,18.26 6.92,18.3 | 6.92,18.3 9.55,18.3 10.12,18.88 10.5,18.88 10.62,19 13.12,19 13.5,19.38 14.88,19.38 15.75,18.5 17.88,18.5 18.62,19.25 20,19.25 20.62,19.88 v20.88,19.88 | 6.92,18.3 6.89,18.26
PC8  (via drill 0.33)
  Top 0.152: v2.88,17.98 2.88,17.77 2.1,17 2.1,16.4 2.9,15.6 2.9,14.7 3.3,14.3 4.1,14.3 P1.10 | U1.39 20.75,18.12 20.5,17.88 19.1,17.88 v18.12,16.9
  Bottom 0.152: v18.12,16.9 17.9,17.12 17.25,17.12 17,16.88 16.25,16.88 15,18.12 13.5,18.12 13,18.62 10.75,18.62 10.62,18.5 10.25,18.5 9.62,17.88 7,17.88 6.85,17.73 5.22,17.73 4.97,17.98 v2.88,17.98
PC9  (via drill 0.33)
  Top 0.152: v34.12,17.62 34.25,17.75 P2.10 | v23.9,20.68 23.07,20.68 22.62,21.12 22.12,21.12 21.5,20.5 20.5,20.5 20.25,20.25 U1.40
  Bottom 0.152: v34.12,17.62 33.88,17.62 33.5,18 33.38,18 32.75,18.62 32.75,18.75 32.38,19.12 31.5,19.12 30.62,20 30.25,20 30.2,20 29.3,20.9 24.7,20.9 24.4,20.6 24,20.6 v23.9,20.68
PC10
  Top 0.152: U1.51 13.03,15.75 12.85,15.93 11.93,15.93 11.5,16.35 11.07,16.35 10.1,17.32 9.6,17.32 8.68,18.25 7.83,18.25 P1.25
PC11
  Top 0.152: U1.52 13.07,15.25 12.72,15.6 11.8,15.6 11.38,16.02 10.95,16.02 9.97,17 9.47,17 8.72,17.75 7.83,17.75 P1.23
PC12
  Top 0.152: U1.53 13.12,14.75 12.6,15.28 11.68,15.28 11.25,15.7 10.82,15.7 9.85,16.68 9.35,16.68 8.78,17.25 7.83,17.25 P1.21
PC13  (via drill 0.33)
  Top 0.152: v5.58,13.25 P1.6 | 4.12,13.25 P1.6 | U1.2 v16.75,6.15 | SW1.1 7.25,4.88 12.75,4.88 SW1.2 | 13,4.88 12.88,4.88 SW1.2 | 13,4.88 14.25,4.88 | 14.25,4.88 v14.25,5.88 14.25,4.88 | 14.25,4.88 SW1.2 | 13,4.88 SW1.2 | C22.1 1.98,13.25 P1.6 | v31.5,6.12 32.25,6.12 32.38,6.25 32.38,6.5 R5.1 | 29.62,4 v29.62,4.25 | 14.25,4.88 14.38,4.75 14.38,3.62 v14.38,3.5
  Bottom 0.152: v14.25,5.88 14.5,5.62 15.62,5.62 16.25,5.62 16.75,6.12 v16.75,6.15 16.75,6.5 16.38,6.88 13.7,9.55 9.7,9.55 6,13.25 v5.58,13.25 5.5,13.25 | v31.5,6.12 v29.62,4.25 29.62,3.88 29.5,3.75 29.38,3.75 29.12,3.5 27.62,3.5 26.12,2 26,1.88 15.25,1.88 14.38,2.75 v14.38,3.5
PD2
  Top 0.152: U1.54 14.18,14.25 13.18,14.25 12.47,14.95 11.55,14.95 11.12,15.38 10.7,15.38 9.72,16.35 9.22,16.35 8.82,16.75 7.83,16.75 P1.19
PWR_ON  (via drill 0.33)
  Top 0.152: v33.5,14.75 33.5,18.7 v33.8,18.98 | v37.12,13.38 37,13.25 P2.28 | v2.88,18.88 3.38,18.75 P1.28 | POWER.2 32.75,4.88 29.25,4.88 POWER.1 | 26.38,22.88 U4.2 26.5,22.88 v27.62,22.88 28.12,22.38 28.12,21.18 28.3,21 30.95,21 v31.43,20.52 | v6.25,20.5 6.75,20.5 7.22,20.98 7.22,21.2 8.7,22.68 10.15,22.68 | 32.88,5 POWER.2 | v34.62,7.75 34.62,5.5 34,4.88 32.88,4.88 POWER.2 | 10.15,22.68 v10.47,22.35 10.15,22.68
  Bottom 0.152: v6.25,20.5 5.62,20.5 4,18.88 v2.88,18.88 | v10.47,22.35 12.25,24.12 17.62,24.12 18.88,22.88 23.38,22.88 23.75,23.25 24.25,23.25 24.85,22.65 27.35,22.65 v27.62,22.88 | 33.75,19 v33.8,18.98 33.7,19 33.5,19 32.6,19.9 31.8,19.9 31.35,20.35 31.35,20.52 v31.43,20.52 | v34.62,7.75 35,8.12 35,9.97 35.41,10.38 36.12,10.38 37.5,11.75 37.5,13.38 v37.12,13.38 35.88,13.38 34.5,14.75 v33.5,14.75
RESET#  (via drill 0.33)
  Top 0.152: P1.1 7.9,12.3 8,12.3 P1.1 | U1.7 19.3,7.3 19.3,7.8 U1.7 | v33.7,20.15 33.27,19.75 P2.1 31.25,19.75 31.12,19.88 30.5,19.88 30.12,19.5 30.12,19.25 29.75,18.88 v29.12,18.88 | v18.88,9.12 18.88,8.38 19.25,8 U1.7 | P1.1 v9.32,12.25 9.38,12.25 9.5,12.12 9.5,11.38 R1.1 | v17.52,11.05 17.75,11.25 17.75,12.38 18.38,13 18.38,15.18 19.45,16.25 20.75,16.25 21.62,17.12 v21.88,17.12 | 33,30.88 33.02,30.89 RESET.2 | v7.38,11 7.38,11.62 7.38,12.12 7.5,12.25 7.75,12.25 P1.1 | 4.38,9.25 C21.1 4.38,9.25 | v4,10.25 4,9.5 4,9.25 4.38,9.25 | RESET.1 28,31 30,31 34,31 RESET.2 | RESET.2 33.8,30.82 34.1,30.52 34.1,30.07 v34.1,29.45
  Bottom 0.152: 35.11,21.56 v33.7,20.15 | v9.32,12.25 9.32,11.43 10.18,10.57 15.05,10.57 15.15,10.68 15.53,11.05 v17.52,11.05 17.52,10.47 v18.88,9.12 18.8,9.1 | v29.12,18.88 27.88,17.62 22.5,17.62 22,17.12 v21.88,17.12 | 38.5,24.99 38.5,25 | 35.12,21.62 35.11,21.56 | 35.12,21.62 37.75,21.62 38.5,22.38 38.5,25 | 35.12,21.62 35.11,21.56 | v4,10.25 4.12,10.38 6.75,10.38 v7.38,11 | 38.5,25 38.48,25.07 36.92,26.62 35.75,26.62 34.1,28.27 v34.1,29.45
RSV0
  Top 0.152: RSV0.P$1 30.88,19.25 32.12,19.25 P2.3
RSV1
  Top 0.152: P2.5 32.12,18.75 31.25,18.75 31.12,18.62 31,18.62 30.62,18.25 30.5,18.25 RSV1.P$1
RSV2
  Top 0.152: P2.17 32.12,15.75 31.38,15.75 30.62,15 30.25,15 29.75,15 28.88,14.12 RSV2.P$1
RSV3
  Top 0.152: RSV3.P$1 30.25,14.12 31.38,15.25 32.12,15.25 P2.19
STAT
  Top 0.152: R8.2 21.35,27.73 20.62,27 19.75,27 U3.1
VBAT  (via drill 0.33)
  Top 0.305: v8.5,24.75 CN1.1 6.38,24.75 | 19.62,25 U3.3 | 19.5,25 U3.3 | C20.1 18.12,25.38 18.57,24.93 U3.3 | v20.93,24.93 U3.3 | Q2.3 v22.65,29.88
  Bottom 0.305: v8.5,24.75 10.78,24.75 11.57,25.52 20.32,25.52 v20.93,24.93 21.25,24.6 22.71,24.6 23.29,25.18 23.29,29.24 v22.65,29.88
VCC  (via drill 0.33)
  Top 0.305: 4.25,19.25 P1.30 4.25,19.38 4.25,19.75 P1.32 v5.75,19.75 | P2.30 35.88,12.75 35.88,12.25 P2.32 36,12.25 37,12.25 38.5,13.75 38.5,26 38.12,26.38 36.5,26.38 35.88,26.38 34.75,26.38 34.12,25.75 v33.38,25.75 Q1.3 33.38,25 | U2.3 19.38,22.75 v19.38,23.75
  Bottom 0.305: v5.75,19.75 7.8,19.75 9.5,21.48 9.5,22.75 11.75,25 18.12,25 18.23,24.9 v19.38,23.75 23,23.75 25.25,26 32.67,26 32.88,25.75 v33.38,25.75
VCC_3V3  (via drill 0.33)
  Top 0.152: P2.31 32.25,12.25 32.25,12.62 P2.29 | v7.5,20.43 7.5,19.75 P1.31 | C2.1 11.25,9.5 9.62,9.5 R1.2 9.5,9.5 v8.45,9.5 | 24.5,4.62 C1.1 | R12.1 v7.5,22.75 | v39.12,6.88 38.25,6.88 | 38.25,6.88 38.12,6.88 38.25,6.88 | 38.25,6.88 BOOT1.2 38.25,6.88 | 38.25,6.88 38.25,9.25 BOOT0.2 | R3.2 29.05,6.5 v29.57,6.5 R5.2 30.62,6.5 30.62,6.88 30.75,7 v31.5,7 | v2.12,8.38 2.12,9.25 2,9.38 R14.1
  Top 0.254: 32.19,12.75 P2.29 | v24.07,10.18 24.25,10.25 U1.19 26.75,10.25 28.18,11.68 28.9,11.68 | v16.46,9.38 16.35,9.25 U1.64 13.25,9.25 13,9.5 11.38,9.5 C2.1 | v22.95,8.91 22.25,8.21 U1.13 22.25,7.12 22.25,6.5 22.75,6 22.75,4.75 C4.1 | v9.28,19.77 9.15,19.75 P1.31 P1.29 | v16.6,17.55 16.25,17.98 U1.48 16.25,19.4 15.18,20.48 15.18,20.75 C18.1 | 32.12,12.25 P2.31 31.12,12.25 30.38,11.5 C3.1 30.27,11.68 28.9,11.68 | 22.19,23.52 C11.1 | C4.1 v22.75,3.75 | 28.9,11.68 29.05,11.68 C17.1 28.9,11.68 | v16.5,21.75 16.38,21.62 15.88,21.62 15.12,20.88 14.88,20.88 C18.1 | C18.1 C6.1 12.53,20.85 12.38,20.6 12.18,20.6 v12.03,20.6 | C19.1 27.38,18 25.88,18 C5.1 | C1.1 24.38,4.62 22.88,4.62 C4.1
  Top 0.305: U1.32 25.88,16.75 26,16.88 C5.1 25.88,18.12 | 12.88,20.62 C6.1 | 21.53,23.65 21.62,23.75 21.94,23.75 U2.2 | 21.53,23.65 20.75,22.88 20.75,22.12 v20.62,21.93 | v24.75,24.12 24.12,23.5 23.75,23.5 C11.1 | 31.12,23.6 31.12,23.62 | 31.12,23.6 31.93,24.38 31.93,25.02 31.88,25 v31.93,25 | 22.19,23.52 21.66,23.52 21.53,23.65 | 31.12,23.6 R2.1
  Top 0.406: C5.1 v26,18.88
  Bottom 0.152: v7.5,22.75 7.5,21.88 v7.5,20.43 | v29.57,6.5 29.57,5.9 29.57,5.62 29.57,5.22 28.82,4.47 28.77,4.47 28.75,4.4 25.12,4.4 25.05,4.4 23.77,4.4 23.2,3.83 22.77,3.83 v22.75,3.75 | v8.45,9.5 8.38,9.5 3.75,9.5 3.25,9.5 v2.12,8.38 | v39.12,6.88 36.88,6.88 35.88,6.88 35.25,6.25 34.62,6.25 34,6.25 33,7.25 32.62,7.25 32.25,6.88 32,6.88 31.75,6.88 31.62,6.88 v31.5,7
  Bottom 0.254: v9.28,19.77 10.1,20.6 11.97,20.6 v12.03,20.6 | 23,9 23,9.1
  Bottom 0.305: 23,9 v22.95,8.91 | v20.62,21.93 20.38,21.75 v16.5,21.75 | v24.75,24.12 25.62,25 v31.93,25
  Bottom 0.406: v16.46,9.38 16.46,8.74 16.48,8.72 17.79,7.38 21.41,7.38 v22.95,8.91 23.38,9.34 23.38,10.12 | v26,18.88 25.5,18.5 21.38,18.5 20.48,17.6 | v16.6,17.55 16.93,17.55 17,17.62 20.48,17.6 | 20.35,17.6 20.48,17.6 | 20.48,17.6 20.48,16.02 22.38,14.12 22.38,12.38 23.38,11.38 23.38,10.12 | v24.07,10.18 23.43,10.18 23.38,10.12
VCC_BKUP  (via drill 0.33)
  Top 0.152: v4.12,8.38 4.25,8.38 v4.12,8.38 | v4.12,8.38 3.62,8.38 2.75,7.5 2.62,7.5 R14.2 | v15.12,7.25 15.38,7.5 16.12,7.5 16.25,7.38 U1.1
  Bottom 0.152: v4.12,8.38 14.38,8.38 15.12,7.62 v15.12,7.25
VCC_SEL  (via drill 0.33)
  Top 0.152: Q1.2 35.77,25.65 R7.1
  Top 0.305: v26.88,24.25 26.62,24.12 26.62,23.5 U4.1 | Q2.2 23.5,31.12 25.5,31.12 25.5,30.85 D5.C 25.12,31 25.38,30.75 v25.38,29.88 | 26.75,24.38 v26.88,24.25 | v34.12,23.5 34.5,23.88 34.5,24.12 34.5,25.12 34.88,25.5 35.25,25.5 Q1.2 35.25,25.38 | v26.62,27.5 26.62,25.88 26.75,25.75 26.75,24.5 v26.88,24.25
  Bottom 0.305: v34.12,23.5 33.5,23.5 32.75,24.25 32.62,24.25 31.75,24.25 31.5,24.5 27,24.5 v26.88,24.25 | v26.62,27.5 25.38,28.75 v25.38,29.88
VCC_USB  (via drill 0.33)
  Top 0.305: v17.75,30.25 17.38,30.25 16.75,30.25 F1.1 | 11.3,26.68 v11.32,26.68 U$1.1
  Bottom 0.305: v17.75,30.25 17.75,30 15.38,27.62 15.25,27.5 14.12,27.5 13.3,26.68 v11.32,26.68
VCC_USBF  (via drill 0.33)
  Top 0.305: v18.75,30.25 19.62,30.25 F1.2 | v15,26.52 15,25.62 C16.1 | 23.85,28.62 v22.32,28.62 | 23.85,28.62 Q2.1 | v22.25,25.82 22.25,25.12 U3.4 | R10.1 v16.5,27.5 | 23.85,28.62 24.68,28.62 D5.A
  Bottom 0.305: v15,26.52 15.53,26.52 v16.5,27.5 16.5,28 17.12,28.62 v18.75,30.25 20.82,30.25 21.95,29.12 v22.32,28.62 22.32,26.02 v22.25,25.82

## Text on the board
tNames: MatchBox / V1.0